# Altium PCB Walrus.PcbDoc (part 3 of 3)
Units mm, origin at the board's own origin, x right, y up, seen from the top; angles counter-clockwise.
Board outline 65 x 30.33 mm, 2 copper layers (Top, Bottom), stack 1.545 mm thick; 106 components, 76 nets, 395 pads, 305 vias.
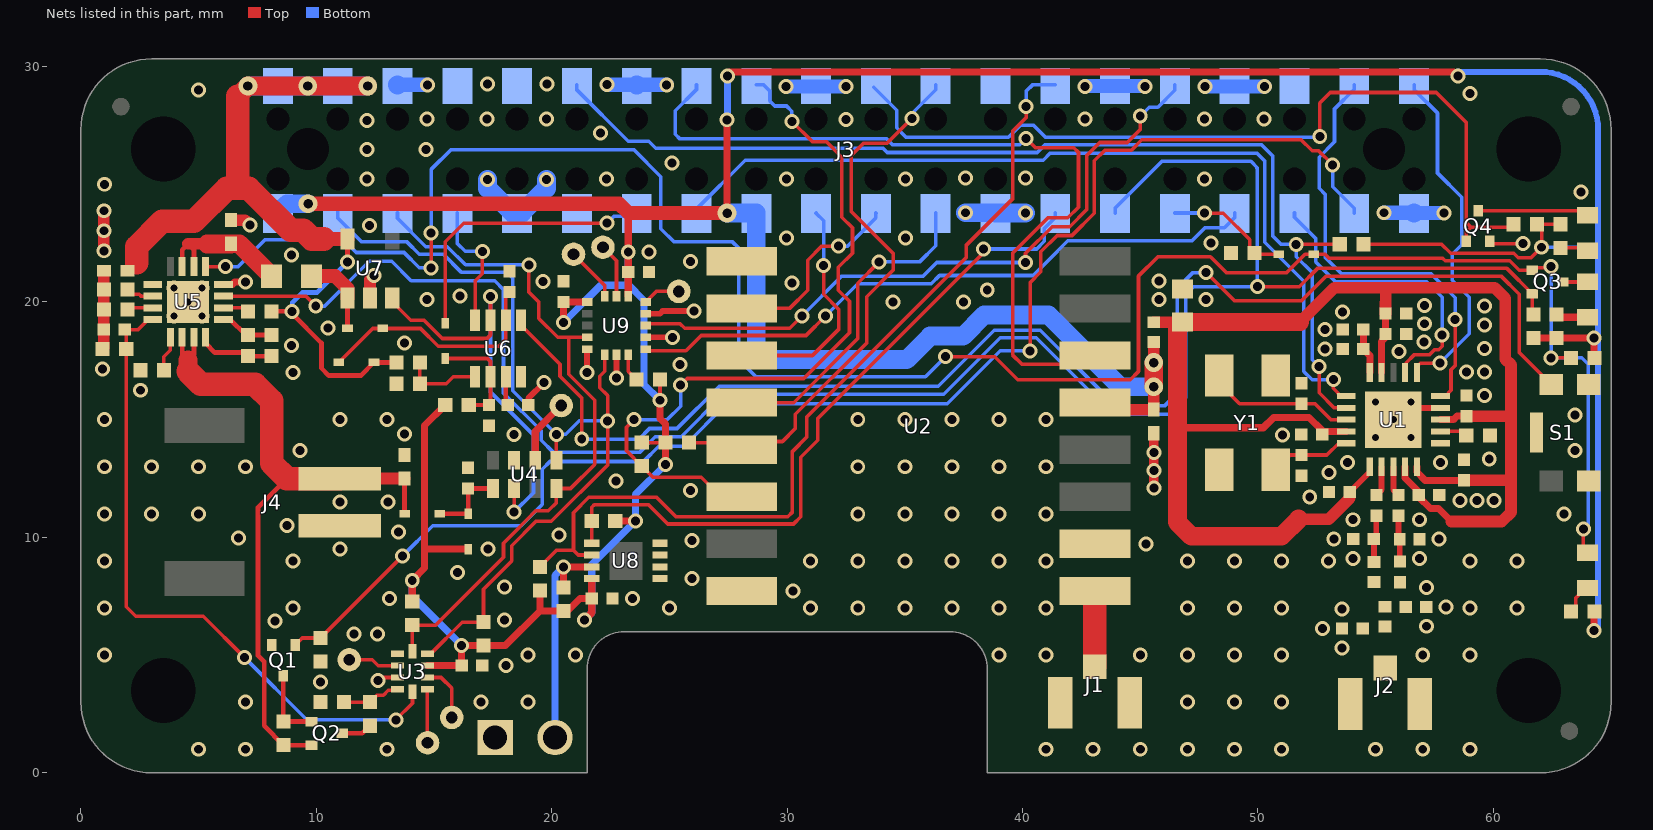
[diagram p2: the nets of this part, all layers, seen from the top]

## Via types
v1: diameter 0.635, hole 0.381, Top to Bottom, 288 vias
v2: diameter 0.635, hole 0.3, Top to Bottom, 10 vias
v3: diameter 0.8, hole 0.4, Top to Bottom, 7 vias

## Nets (pads, with @x,y where several pads share a name; then routed paths per layer and width w, separated by ;. In a path a pad name is that pad's centre, name@x,y a point inside that pad or via, vN(x,y) a via of type N, cw(c..) or ccw(c..) an arc to the next point about the centre after c; other vN are vias at no path point)
3V3: C2.2 C3.2 C12.2 C13.2 C14.2 D2.2 FB1.2 J3.1 J3.17 R5.2 R6.2 R13.2 R17.2 R18.2 R19.2 R20.2 R21.2 R24.2 R25.2 R26.2 R27.2 R29.2 R30.2 R31.2 R32.2 U2.13 U3.8 U8.8 U9.1 U9.14 | length 189.6
  Top w0.152: R30.2@23.825,14.025 R31.2@24.825,14.025 ; v1(24.6,15.825) R27.2@24.6,16.7 ; R32.2@54.475,22.45 57.8,22.45 58.185,22.065 60.86,22.065 61.05,21.875 61.6,21.875 v1(62.05,22.325) 62.05,23.1 R29.2@61.85,23.3 R21.2@62.85,23.3
  Top w0.3: R5.2@14.075,7.275 v1(14.075,8.175) 14.6,8.7 14.6,14.75 R13.2@15.475,15.625 ; 14.6,9.5 D2.2@16.45,9.5 ; U3.8@14.72,4.55 C3.2@16.175,4.55 ; C3.2@16.175,4.53 C3.2@16.175,4.55 ; R24.2@19.5,7.75 19.5,6.875 ; v1(20.5,19.125) C14.2@20.5,20 U9.1@21.5,20 ; v1(21.4,6.5) 21.7,6.8 C12.2@21.7,7.4 ; U8.8@21.7,8.25 C12.2@21.7,7.4 ; R25.2@22.7,10.7 v1(23.55,10.7) ; U9.14@23.25,20.25 C13.2@23.25,21.275 v1(23.25,22.125) 23.25,23.765 23.26,23.775 ; v1(24.6,15.825) 24.6,15.05 24.825,14.825 R31.2@24.825,14.025 v1(24.825,13.1) ; v3(27.45,23.775) v1(27.45,27.74) ; v1(27.475,29.6) 27.475,29.7 27.55,29.775 58.325,29.775 v1(58.5,29.6) ; R20.2@61.7,18.475 R18.2@62.675,18.475 v1(64.275,18.475) 64.275,17.65 R17.2@64.3,17.625 ; v1(64.275,6.05) 64.275,6.825 R19.2@64.3,6.85 ; C3.2@16.175,4.55 v1(16.175,5.4) R6.2@17.1,5.4 18.025,5.4 19.5,6.875 ; 19.5,6.875 R26.2@20.5,6.875 20.67,6.875 21.195,7.4 C12.2@21.7,7.4
  Top w0.5: U2.13@43.075,15.725 43.375,15.425 C2.2@45.575,15.425 v3(45.575,16.4) ; v3@45.575,16.8 FB1.2@45.575,18.26
  Top w0.6: v3(9.65,24.175) 22.86,24.175 23.26,23.775 v3(27.45,23.775)
  Top w0.8: v3(45.575,16.4) v3(45.575,17.425)
  Bottom w0.152: v1(62.05,22.325) 64.475,22.325
  Bottom w0.25: v1@58.5,29.775 62,29.775 cw(c62,27.325) 64.45,27.325 64.45,22.325 64.45,18.625 v1@64.3,18.475 ; v1(64.275,6.05) 64.3,6.05 64.45,6.2 64.45,18.325 v1@64.3,18.475 ; v1@64.3,18.475 v1(64.275,18.475) v1@64.3,18.475
  Bottom w0.3: v1(14.075,8.175) 14.075,7.5 v1(16.175,5.4) ; v1(20.5,19.125) 22.085,20.71 23.25,20.71 23.25,20.737 ; v1(21.4,6.5) 21.7,6.8 21.7,8.85 v1(23.55,10.7) 23.55,11.825 v1(24.825,13.1) ; v1(23.25,22.125) 23.25,20.737 ; v1(24.6,15.825) 23.925,16.5 23.925,20.062 23.25,20.737 ; v1@27.475,27.765 v1(27.475,29.6) ; v1(58.5,29.6) v1@58.5,29.775
  Bottom w0.8: J3.1@8.37,23.78 J3.1@8.375,23.785 ; J3.1@8.37,23.79 J3.1@8.375,23.785 ; v3(9.65,24.175) 8.765,24.175 J3.1@8.375,23.785 ; v3(27.45,23.775) 28.675,23.775 J3.17@28.685,23.785 ; J3.17@28.69,23.79 J3.17@28.685,23.785 ; v3(45.575,16.4) 44.15,16.4 41.1,19.45 38.375,19.45 37.475,18.55 36.075,18.55 35.075,17.55 29.125,17.55 28.69,17.985 28.69,23.78 J3.17@28.685,23.785
5V0: C5.2 D4.2 J3.2 J3.4 R7.1 R15.2 U5.13 U7.5 | length 38
  Top w0.2: R7.1@8.1,19.6 v1(8.975,19.6) 8.975,19.5 10.22,18.255 10.22,17.185 10.53,16.875 11.895,16.875 D4.2@12.45,17.43 13.395,17.43 R15.2@13.4,17.425 ; v1(11.325,21.7) U7.5@11.325,22.675
  Top w0.6: 10.325,22.675 U7.5@11.325,22.675
  Top w0.8: 6.666,28.746 7.09,29.17 v3@12.185,29.17
  Top w1: 2.375,21.675 2.375,22.35 3.45,23.425 4.8,23.425 6.2,24.825 7.133,24.825 8.921,23.037 9.45,23.037 9.812,22.675 10.325,22.675 ; 6.666,24.825 6.666,28.746
  Bottom w0.2: v1(8.975,19.6) 8.975,19.975 9.4,20.4 10.025,20.4 v1(11.325,21.7)
  Bottom w0.8: v3(7.095,29.175) v3(9.635,29.175) 10.905,29.175 10.91,29.18 10.915,29.175 v3(12.185,29.175) ; J3.2@8.355,29.175 J3.2@8.36,29.18 ; J3.2@8.365,29.175 J3.2@8.37,29.18
ADC1: TP5.1 U9.16 | length 2.3
  Top w0.152: TP5.1@20.925,22.025 22.25,20.7 U9.16@22.25,20.25
ADC2: TP6.1 U9.15 | length 2.3
  Top w0.152: TP6.1@22.175,22.325 22.75,21.75 U9.15@22.75,20.25
ADC3: TP7.1 U9.13 | length 1.6
  Top w0.152: U9.13@24,20 24.45,20.45 TP7.1@25.4,20.45
AIN2: TP1.1 U3.6 | length 2.3
  Top w0.152: U3.6@14.72,3.55 14.72,1.28 TP1.1@14.725,1.275
AIN3: TP2.1 U3.7 | length 2.5
  Top w0.152: U3.7@14.72,4.05 15.3,4.05 15.75,3.6 TP2.1@15.75,2.35
ALERT/RDY: TP3.1 U3.2 | length 2.2
  Top w0.152: TP3.1@11.4,4.8 12.375,4.8 12.625,4.55 U3.2@13.45,4.55
CHG_CHG_N: D8.1 D11.2 Q3.1 R17.1 U5.9 | length 91.5
  Top w0.152: U5.9@5.3,21.5 v1(6.15,21.5) ; v1(14.875,21.45) v1(14.875,22.925) ; v1(36.725,17.675) 38.82,17.675 39.795,16.7 44.575,16.7 44.925,17.05 44.925,21.1 45.75,21.925 47.98,21.925 48.655,21.25 51.225,21.25 52,22.025 D11.2@52.375,22.025 52.85,22.025 53.025,21.85 57.85,21.85 57.95,21.75 60.7,21.75 61.1,21.35 Q3.1@61.65,21.35 61.75,21.45 62.4,21.45 v1(62.45,21.5) ; v1(62.45,17.625) R17.1@63.3,17.625 ; v1(63.825,10.35) 63.825,9.525 D8.1@64,9.35
  Bottom w0.152: v1(6.15,21.5) 6.675,21.5 7.825,22.65 11.15,22.65 11.7,22.1 13.725,22.1 14.375,21.45 v1(14.875,21.45) ; v1(14.875,22.925) 14.875,25.625 15.725,26.475 23.484,26.475 24.635,25.325 24.635,23.115 25.2,22.55 27.681,22.55 27.942,22.289 27.942,17.558 28.675,16.825 35.875,16.825 v1(36.725,17.675) ; v1(62.45,21.5) v1(62.45,17.625) 63.756,17.625 64.025,17.356 64.025,10.55 v1(63.825,10.35)
CHG_EN1: R7.2 U5.6 | length 1.1
  Top w0.152: U5.6@6.05,19.75 6.95,19.75 R7.2@7.1,19.6
CHG_ISET: C6.2 R11.2 U3.5 U5.16 | length 28
  Top w0.152: C6.2@1.855,18.825 1.925,18.755 R11.2@1.925,18 1.925,7.06 2.335,6.65 5.2,6.65 v1(6.95,4.9) ; C6.2@1.925,18.775 1.975,18.825 2.425,18.825 2.85,19.25 U5.16@3.05,19.25 ; v1(13.376,2.251) 14.085,2.96 U3.5@14.085,3.44
  Bottom w0.152: v1(6.95,4.9) 9.599,2.251 v1(13.376,2.251)
CHG_ITERM: R12.2 U5.15 | length 1.1
  Top w0.152: R12.2@1.975,19.675 2.05,19.75 U5.15@3.05,19.75
CHG_OUT: C8.2 F1.1 U5.10 U5.11 | length 6.3
  Top w0.2: U5.11@4.3,21.5 4.3,22.219 4.55,22.469 4.8,22.219 U5.10@4.8,21.5
  Top w0.5: 4.55,22.469 5.369,22.469
  Top w0.8: 5.369,22.469 C8.2@6.375,22.469 ; C8.2@6.375,22.475 6.725,22.475 F1.1@8.1,21.1
CHG_TMR: R10.2 U5.14 | length 1.2
  Top w0.152: R10.2@1.975,20.525 2.175,20.325 2.475,20.325 2.55,20.25 U5.14@3.05,20.25
CHG_TS: R14.2 U5.1@3.8,18.5 | length 1.5
  Top w0.152: R14.2@3.525,17.1 3.525,17.675 3.8,17.95 U5.1@3.8,18.5
DCOUPL: C51.2 C512.2 U1.5 | length 1.9
  Top w0.3: C51.2@54.475,18.825 C512.2@54.475,18 54.75,17.725 U1.5@54.75,17
GND: C1.1 C2.1 C3.1 C4.1 C5.1 C6.1 C7.1 C8.1 C9.1 C10.1 C11.1 C12.1 C13.1 C14.1 C20.1 C21.1 C41.1 C51.1 C91.1 C111.1 C122.1 C123.1 C124.1 C141.1 C151.1 C181.1 C412.1 C512.1 J1.2 J1.3 J2.2 J2.3 J3.6 J3.9 J3.14 J3.20 J3.25 J3.30 J3.34 J3.39 J4.2 J5.1 L131.1 Q1.2 Q4.2 R1.1 R4.1 R8.1 R8.2 R9.1 R9.2 R10.1 R11.1 R12.1 R14.1 R16.1 R23.1 R171.1 S1.2 S1.4 S1.5 U1.16 U1.19 U1.21 U2.1 U2.8 U2.10 U3.1 U3.3 U4.3 U5.4 U5.5 U5.8 U5.17 U6.4 U7.2 U8.1 U8.2 U8.3 U8.4 U9.5 U9.7 U9.10 U9.12 Y1.2 Y1.4 | length 47.7
  Top w0.152: v1(12.625,3.925) 12.75,4.05 U3.3@13.45,4.05 ; Q4.2@59.85,22.575 59.95,22.475 v1(61.25,22.475)
  Top w0.2: U5.4@5.3,18.5 5.3,18.241 5.691,17.85 6.95,17.85 R9.2@7.1,17.7 R9.1@8.1,17.7 ; U5.5@6.05,19.25 6.35,19.25 7,18.6 R8.2@7.1,18.6 R8.1@8.1,18.6
  Top w0.25: C11.1@19.005,15.625 19.005,15.905 v1(19.675,16.575) ; v1(21.5,17) U9.5@21.5,18 ; v1(22.75,16.775) U9.7@22.75,17.75 ; U9.10@24,18.5 v1(25.125,18.5) ; U9.12@24,19.5 24.6,19.5 24.709,19.609 v1(26.05,19.609) ; v2(55.75,15) 56.25,15.5 U1.19@57.75,15.5
  Top w0.3: U5.8@6.05,20.75 6.435,20.75 6.535,20.85 v1(7,20.85) ; v1(18.4,14.375) v1@18.4,14.525
  Top w0.4: v1(45.575,12.1) v1(45.575,12.85) v1(45.575,13.6) C2.1@45.575,14.425
  Top w0.5: R11.1@0.925,18 0.975,18.05 R12.1@0.975,19.675 R10.1@0.975,20.525 C5.1@0.975,21.325 ; v1(0.975,22.175) v1(0.975,23.025) v1(0.975,23.875) ; C8.1@6.375,23.475 6.975,23.475 v1(7.175,23.275) ; U7.2@12.275,20.175 12.275,20.95 v1(12.45,21.125)
  Bottom w0.6: J3.6@13.455,29.225 v1(14.725,29.225) ; v1@22.34,29.225 v1(24.885,29.225) ; v1(29.95,29.15) 32.475,29.15 v1(32.5,29.15) ; v1@42.65,29.175 v1@45.2,29.175 ; v1@47.75,29.175 47.775,29.15 v1(50.275,29.15) ; v1(55.36,23.79) J3.39@56.63,23.79 ; J3.39@56.635,23.785 v1(57.905,23.785)
  Bottom w0.8: J3.6@13.45,29.22 13.455,29.225 J3.6@13.45,29.23 ; v1(17.275,25.2) 17.275,24.825 18.32,23.78 18.73,23.78 19.775,24.825 v1(19.775,25.2) ; J3.14@23.61,29.22 J3.14@23.615,29.225 ; v1(37.58,23.79) 38.85,23.79 J3.25@38.855,23.785 ; J3.25@38.85,23.78 J3.25@38.855,23.785 ; v1(40.125,23.785) J3.25@38.855,23.785 ; J3.39@56.63,23.78 56.635,23.785 J3.39@56.63,23.79
  other v1: 5,1 7,1 13,1 41,1 43,1 45,1 47,1 49,1 51,1 55,1 57,1 59,1 7,3 17,3 19,3 47,3 49,3 51,3 10.175,3.85 18.05,4.55 1,5 19,5 21,5 39,5 41,5 45,5 47,5 49,5 51,5 57,5 59,5 53.57,5.3 11.6,5.9 12.6,5.9 52.745,6.125 57.155,6.225 8.25,6.45 18,6.5 53.57,6.95 1,7 9,7 25,7 31,7 33,7 35,7 37,7 39,7 41,7 47,7 49,7 51,7 59,7 61,7 57.98,7.05 13.1,7.4 23.425,7.4 30.25,7.725 57.155,7.875 18,7.9 25.95,8.25 16,8.5 1,9 9,9 31,9 33,9 35,9 37,9 39,9 41,9 47,9 49,9 51,9 53,9 59,9 61,9 54.045,9.1 56.865,9.1 11,9.5 17.3,9.5 45.25,9.725 25.95,9.875 53.22,9.925 57.69,9.925 6.7,9.975 20.3,10.1 13.5,10.225 8.75,10.5 54.045,10.75 56.865,10.75 1,11 3,11 5,11 33,11 35,11 37,11 39,11 41,11 63,11 11,11.5 13.05,11.5 58.575,11.575 59.3,11.575 60.025,11.575 52.2,11.725 25.9,12 22.725,12.4 53.02,12.75 1,13 3,13 5,13 7,13 33,13 35,13 37,13 39,13 41,13 53.8,13.175 57.75,13.175 59.825,13.325 9.3,13.7 63.475,13.7 51.05,14.35 13.75,14.4 1,15 11,15 13,15 33,15 35,15 37,15 39,15 41,15 63.475,15.2 59.625,16.025 2.525,16.25 9,17 58.85,17.025 59.625,17.025 0.925,17.15 25.45,17.35 56,17.9 52.85,18 59.625,18.025 8.95,18.15 13.75,18.25 57.05,18.3 52.85,18.825 10.5,18.9 59.625,19.025 57.075,19.075 53.6,19.575 59.625,19.825 57.075,19.85 34.5,20 37.5,20 14.7,20.1 45.8,20.1 47.8,20.1 16.1,20.25 38.5,20.5 30.2,20.8 19.625,20.875 45.8,20.9 25.9,21.725 8.95,22 24.13,22.125 48,22.5 29.975,22.725 35.025,22.725 12.25,23.25 63.725,24.675 1,25 12.15,25.225 22.325,25.225 29.975,25.225 35.025,25.225 47.725,25.225 37.575,25.275 40.125,25.275 25.1,25.9 12.15,26.475 14.65,26.475 22.075,27.175 12.15,27.7 32.5,27.75 14.7,27.775 17.25,27.775 19.775,27.775 42.65,27.775 47.725,27.775 50.25,27.775 59,28.85 5,29 42.65,29.15 45.2,29.15 47.75,29.15 22.34,29.23 17.275,29.25 19.8,29.25
  other v2: 55,14.25 56.5,14.25 55,15.75 56.5,15.75 3.95,19.4 5.15,19.4 4.55,20 3.95,20.6 5.15,20.6
GPIO2/SDA1I2C: J3.3 R6.1 U3.9 U4.1 U9.6 | length 36.9
  Top w0.152: U3.9@14.72,5.05 14.85,5.05 16.2,6.4 R6.1@17.1,6.4 17.1,7.8 18.3,9 18.3,9.65 19.333,10.683 19.983,10.683 22.375,13.075 v1(22.375,14.95) 22.375,16.025 22.038,16.362 22.038,16.84 22.25,17.053 U9.6@22.25,17.75 ; U4.1@20.2,13.275 v1(20.2,14.375)
  Bottom w0.152: J3.3@10.91,24.01 10.91,23.565 11.925,22.55 13.85,22.55 14.375,22.025 15.4,22.025 16.17,21.255 18.11,21.255 18.35,21.015 18.35,16.225 19.875,14.7 v1(20.2,14.375) 20.6,14.375 21.175,14.95 v1(22.375,14.95)
GPIO3/SCL1I2C: J3.5 R5.1 U3.10 U4.8 U9.4 | length 29.7
  Top w0.152: U3.10@14.085,5.16 14.075,5.17 R5.1@14.075,6.275 15.075,6.275 17.95,9.15 17.95,9.75 19.327,11.127 19.852,11.127 20.2,11.475 U4.8@20.2,12.075 20.8,12.075 21.825,13.1 21.825,15.825 20.725,16.925 20.725,18.5 ; v1(19.025,21.575) 19.025,20.425 19.45,20 19.45,19.3 20.25,18.5 20.725,18.5 ; U9.4@21.5,18.5 20.725,18.5
  Bottom w0.152: J3.5@13.45,23.78 13.45,23.55 14.65,22.35 15.565,22.35 16.34,21.575 v1(19.025,21.575)
GPIO4/PB_INT_N: J3.7 U6.8 | length 5.5
  Top w0.152: U6.8@16.75,19.22 16.75,20.9 17.05,21.2 v1(17.05,22.15)
  Bottom w0.152: J3.7@15.99,23.78 15.99,22.485 16.325,22.15 v1(17.05,22.15)
GPIO5/PG_N: J3.29 Q3.2 R20.1 U5.7 | length 84.8
  Top w0.152: U5.7@6.05,20.25 9.55,20.25 v1(9.975,19.825) ; v1(49.975,20.65) 51.75,20.65 52.525,21.425 60.575,21.425 Q3.2@61.65,20.35 61.65,19.55 R20.1@61.725,19.475
  Bottom w0.152: v1(9.975,19.825) 10.35,19.825 12.25,21.725 13.2,21.725 14.025,20.9 17.575,20.9 17.95,20.525 17.95,16.125 19.55,14.525 19.55,14.125 20.05,13.625 23.75,13.625 24.4,14.275 25.5,14.275 27.3,16.075 36.65,16.075 39.05,18.475 40.575,18.475 43.825,15.225 46.225,15.225 46.925,15.925 46.925,20.313 47.261,20.65 v1(49.975,20.65) 49.975,25.65 49.95,25.675 49.975,25.7 49.7,25.975 45.925,25.975 43.93,23.98 J3.29@43.93,23.78
GPIO6/CHG_N: D11.1 J3.31 R23.2 | length 5.3
  Top w0.152: v1(47.725,23.775) 48.525,23.775 49.65,22.65 49.65,22.275 R23.2@49.85,22.075 49.9,22.025 D11.1@50.875,22.025
  Bottom w0.152: J3.31@46.47,23.78 v1@47.72,23.78
GPIO7/SPI0_CE1_N: J3.26
GPIO8/RFM69_CE0_N: J3.24 R31.1 U2.5 | length 24.4
  Top w0.152: R31.1@25.825,14.025 27.775,14.025 U2.5@28.075,13.725 28.425,14.075 29.8,14.075 30.35,14.625 30.35,15.23 33.375,18.255 33.375,20.225 34.5,21.35 34.5,22.07 32.725,23.845 32.725,26.225 33.25,26.75 34.25,26.75 v1(35.3,27.8)
  Bottom w0.152: v1(35.3,27.8) 35.1,27.8 36.31,29.01 J3.24@36.31,29.22
GPIO9/RFM69_MISO: J3.21 U2.2 | length 8.3
  Top w0.152: U2.2@28.075,19.725 30.1,19.725 30.875,20.5 30.875,21.775 31.475,22.375 v1(32.175,22.375)
  Bottom w0.152: v1(32.175,22.375) 32.575,22.375 33.77,23.57 33.77,23.78 J3.21@33.775,23.775
GPIO10/RFM69_MOSI: J3.19 U2.3 | length 9.9
  Top w0.152: U2.3@28.075,17.725 31.075,17.725 32.2,18.85 32.2,19.675 31.55,20.325 v1(31.55,21.55)
  Bottom w0.152: J3.19@31.23,23.78 31.225,23.775 31.55,23.45 v1(31.55,21.55)
GPIO11/RFM69_SCLK: J3.23 U2.4 | length 13.8
  Top w0.152: U2.4@28.075,15.725 30.275,15.725 33,18.45 33,20.8 v1(33.9,21.7)
  Bottom w0.152: v1(33.9,21.7) 35.625,21.7 36.31,22.385 J3.23@36.31,23.78
GPIO12/PWM0/ACC_INT1: J3.32 U9.11 | length 28.9
  Top w0.152: U9.11@24,19 24.075,19.075 25.45,19.075 25.645,18.88 30.105,18.88 v1(30.625,19.4) ; v1(40.125,21.675) 40.125,22.065 41.26,23.2 42,23.2 42.725,23.925 42.725,26.225 43.275,26.775 44.45,26.775 45,27.325 v1(45,27.9)
  Bottom w0.152: v1(30.625,19.4) 32.325,21.1 35.775,21.1 36.35,21.675 v1(40.125,21.675) ; v1(45,27.9) 45.375,28.275 45.75,28.275 46.47,28.995 J3.32@46.47,29.22
GPIO13/PWM1/ACC_INT2: J3.33 U9.9 | length 27.6
  Top w0.152: U9.9@24,18 24.075,17.925 25.7,17.925 26.35,18.575 30.8,18.575 v1(31.625,19.4)
  Bottom w0.152: v1(31.625,19.4) 33,20.775 36.125,20.775 36.475,21.125 40.45,21.125 41.087,21.762 41.925,22.6 47.2,22.6 47.75,23.15 48.575,23.15 49.01,23.585 J3.33@49.01,23.78
GPIO14/UART0_TXD: J3.8
GPIO15/UART0_RXD: J3.10
GPIO16/SPI1_CE2: J3.36
GPIO17/SPI1_CE1: J3.11
GPIO18/CC2500_CE0_N: J3.12 R32.1 U1.7 | length 45.7
  Top w0.152: v1(51.625,22.45) R32.1@53.475,22.45 ; v1(52.6,17.25) 52.6,16.145 53.245,15.5 U1.7@53.75,15.5
  Bottom w0.152: J3.12@21.07,29.22 21.07,29.005 23.25,26.825 24.125,26.825 24.425,26.525 34.075,26.525 34.25,26.35 40.625,26.35 40.95,26.675 50.15,26.675 50.625,26.2 50.625,22.8 50.975,22.45 v1(51.625,22.45) 51.625,21.925 52.3,21.25 52.3,17.55 v1(52.6,17.25)
GPIO19/CC2500_MISO: J3.35 U1.2 | length 12.8
  Top w0.152: U1.2@56.25,17 56.3,17.05 56.3,17.425 56.625,17.75 57.275,17.75 57.5,17.975 57.675,17.975 57.825,18.125 v1(57.825,18.6)
  Bottom w0.152: J3.35@51.55,23.78 51.55,23.6 52.45,22.7 52.45,21.7 53.3,20.85 57.175,20.85 57.825,20.2 v1(57.825,18.6)
GPIO20/CC2500_MOSI: J3.38 U1.20 | length 18.8
  Top w0.152: U1.20@57.75,16 57.95,16 58.2,16.25 58.2,17.125 58.375,17.3 v1(58.375,19.25)
  Bottom w0.152: J3.38@54.09,29.22 54.09,29.04 53.25,28.2 53.25,26.8 52.6,26.15 52.6,24.825 52.85,24.575 52.85,21.9 53.55,21.2 57.35,21.2 58.375,20.175 v1(58.375,19.25)
GPIO21/CC2500_SCLK: J3.40 U1.1 | length 14.9
  Top w0.152: U1.1@56.75,17 56.75,17.25 56.9,17.4 v1(57.725,17.4)
  Bottom w0.152: J3.40@56.63,29.22 56.63,29.02 57.625,28.025 57.625,25.475 58.65,24.45 58.65,22.431 58.25,22.031 58.25,20.925 58.975,20.2 58.975,18.65 v1(57.725,17.4)
GPIO22/CC2500_GDO0: J3.15 U1.6 | length 37.5
  Top w0.152: v1(53.2,16.7) 53.2,16.33 53.53,16 U1.6@53.75,16
  Bottom w0.152: J3.15@26.15,23.78 26.15,23.95 28.225,26.025 40.875,26.025 41.175,26.325 49.95,26.325 50.285,25.99 50.285,22.54 51.95,20.875 51.95,17.05 52.3,16.7 v1(53.2,16.7)
GPIO23/RFM69_DIO0: J3.16 U2.14 | length 34.2
  Top w0.152: v1(40.15,26.95) 40.55,26.55 42.175,26.55 42.375,26.35 42.375,24.025 41.925,23.575 41.08,23.575 39.575,22.07 39.575,17.75 39.975,17.35 41.963,17.35 42.338,17.725 U2.14@43.075,17.725
  Bottom w0.152: J3.16@26.15,29.22 26.15,29.025 25.25,28.125 25.25,27.125 25.45,26.925 34.225,26.925 34.475,26.675 39.875,26.675 v1(40.15,26.95)
GPIO24/RFM69_RST: J3.18 R30.1 U2.6 | length 31.9
  Top w0.152: v1(23.5,15) 23.175,14.675 23.175,13.675 R30.1@23.825,13.025 24.3,12.55 26.35,12.55 27.175,11.725 U2.6@28.075,11.725 ; v1(25.475,16.475) 25.75,16.75 30.709,16.75 32.65,18.691 32.65,20.025 32.175,20.5 32.175,21.475 32.775,22.075 32.775,23.15 32.325,23.6 32.325,26.15 31.675,26.8 31.075,26.8 v1(30.2,27.675)
  Bottom w0.152: v1(23.5,15) 24.9,15 25.475,15.575 v1(25.475,16.475) ; J3.18@28.69,29.22 29.005,29.22 29.26,28.965 29.26,28.54 29.475,28.325 29.975,28.325 30.2,28.1 v1(30.2,27.675)
GPIO25/LED_BLUE: J3.22 Q4.1 R29.1 | length 36.1
  Top w0.152: v1(52.625,27.025) 52.625,28.45 53.075,28.9 57.575,28.9 58.85,27.625 58.85,23.375 59.05,23.175 ; Q4.1@58.85,22.575 58.85,22.975 59.05,23.175 ; R29.1@60.85,23.175 59.05,23.175
  Bottom w0.152: J3.22@33.675,29.125 34.655,28.145 34.655,27.395 35.05,27 39.4,27 39.9,27.5 40.475,27.5 40.975,27 v1@52.625,27
GPIO26/VBATT_MEAS_EN: J3.37 Q1.1 R1.2 | length 60.2
  Top w0.152: Q1.1@9.1,5.425 9.4,5.725 R1.2@10.175,5.725 v1(13.662,9.212) ; v1(40.325,17.925) 40.325,20.83 40.775,21.28 40.775,22.131 41.469,22.825 42.1,22.825 43.05,23.775 43.05,26 43.5,26.45 44.625,26.45 45.069,26.894 51.831,26.894 52.3,26.425 52.575,26.425 v1(53.175,25.825)
  Bottom w0.152: v1(13.662,9.212) 14.95,10.5 18.7,10.5 19.6,11.4 19.6,12.9 19.925,13.225 23.9,13.225 24.55,13.875 25.625,13.875 27.425,15.675 36.8,15.675 39.05,17.925 v1(40.325,17.925) ; v1(53.175,25.825) 53.175,24.9 54.09,23.985 J3.37@54.09,23.78
GPIO27/PB_KILL_RPI_N: D3.1 J3.13 | length 12.1
  Top w0.152: D3.1@15.475,19.1 15.475,22.558 16.267,23.35 v1(22.35,23.35)
  Bottom w0.152: v1(22.35,23.35) 22.65,23.65 23.48,23.65 J3.13@23.61,23.78
ID_SC/I2C_ID_EEP: J3.28 R24.1 U8.6 | length 37.5
  Top w0.152: R24.1@19.5,8.75 20.2,9.45 20.925,9.45 ; U8.6@21.7,9.25 21.125,9.25 20.925,9.45 ; v1(40.15,28.3) 40.15,27.825 39.575,27.25 39.575,24.375 37.6,22.4 37.6,21.875 30.825,15.1 30.825,14.25 30.225,13.65 30.225,11.075 30.025,10.875 25.275,10.875 24.45,11.7 21.575,11.7 20.925,11.05 20.925,9.45
  Bottom w0.152: v1(40.15,28.3) 40.15,28.95 40.42,29.22 J3.28@41.39,29.22
ID_SD/I2C_ID_EEP: J3.27 R25.1 U8.5 | length 29.6
  Top w0.152: U8.5@21.7,9.75 R25.1@21.7,10.7 21.7,11.275 21.82,11.395 24.105,11.395 24.93,10.57 30.27,10.57 30.575,10.875 30.575,13.4 31.3,14.125 31.3,15.05 38.35,22.1 v1(38.35,22.25)
  Bottom w0.152: v1(38.35,22.25) 40.6,22.25 40.925,22.575 40.925,23.125 41.39,23.59 J3.27@41.39,23.78
LIS3DH_CS: R27.1 U9.8 | length 1.2
  Top w0.152: U9.8@23.25,17.75 23.25,17.05 R27.1@23.6,16.7
NetD6_1: D6.1 Q3.3 | length 1.1
  Top w0.152: Q3.3@62.95,20.85 D6.1@64,20.85
NetD6_2: D6.2 R18.1 | length 1.4
  Top w0.3: R18.1@62.675,19.475 62.8,19.35 D6.2@64,19.35
NetD8_2: D8.2 R19.1 | length 1.3
  Top w0.152: R19.1@63.3,6.85 63.5,7.05 63.5,7.425 63.925,7.85 D8.2@64,7.85
NetD9_1: D9.1 Q4.3 | length 4.7
  Top w0.152: Q4.3@59.35,23.875 63.8,23.875 D9.1@64,23.675
NetD9_2: D9.2 R21.1 | length 1.2
  Top w0.152: R21.1@62.85,22.3 63.875,22.3 D9.2@64,22.175
NetJ5_2: J5.2 R26.1 U8.7 | length 9.5
  Top w0.3: R26.1@20.5,7.875 v1(20.5,8.75) U8.7@21.7,8.75
  Bottom w0.3: J5.2@20.14,1.5 20.14,8.39 v1(20.5,8.75)
NetQ1_3: Q1.3 Q2.1 R2.1 | length 3.1
  Top w0.2: Q1.3@8.6,4.125 R2.1@8.6,2.175 Q2.1@9.8,2.175
NetQ2_3: Q2.3 R3.2 | length 1.3
  Top w0.2: Q2.3@11.1,1.675 11.95,1.675 R3.2@12.275,2
PB_5V0: C10.2 D4.1 D5.1 U6.6 | length 10.1
  Top w0.152: D4.1@10.95,17.43 12.395,18.875 D5.1@12.825,18.875 14.425,18.875 15.175,18.125 17.762,18.125 18.05,18.412 U6.6@18.05,19.22 C10.2@18.05,20.425
PB_EN_N: U4.6 U6.7 U7.3 | length 18
  Top w0.152: U7.3@13.225,20.175 13.225,20.015 14.015,19.225 14.575,19.225 15.35,18.45 17.25,18.45 17.4,18.6 U6.7@17.4,19.22 17.275,19.345 17.4,19.47 v1(17.4,20.225) ; v1(18.4,11.075) U4.6@18.4,12.075
  Bottom w0.152: v1(17.4,20.225) 17.4,16.175 19.225,14.35 19.225,11.9 v1(18.4,11.075)
PB_KILL_N: C7.2 D3.2 R13.1 U6.2 | length 4.7
  Top w0.152: D3.2@15.475,17.6 17.275,17.6 17.4,17.475 U6.2@17.4,16.82 17.4,15.7 C7.2@17.325,15.625 R13.1@16.475,15.625
PB_N: S1.1 U6.5 | length 59.8
  Top w0.152: U6.5@18.7,19.22 18.7,19 20.35,17.35 20.35,16.849 21.275,15.924 v1(21.275,14.175) ; v1(47.8,21.25) 49,20.05 51.85,20.05 52.9,21.1 60.325,21.1 61.1,20.325 61.1,17.85 S1.1@62.45,16.5
  Bottom w0.152: v1(21.275,14.175) 23.7,14.175 24.15,14.625 25.325,14.625 27.125,16.425 36.425,16.425 38.8,18.8 40.75,18.8 43.95,15.6 46.05,15.6 46.575,16.125 46.575,20.589 47.236,21.25 v1(47.8,21.25)
PB_ON: R15.1 R16.2 U6.1 | length 3.4
  Top w0.152: R15.1@14.4,17.425 R16.2@14.4,16.525 15.525,16.525 15.82,16.82 U6.1@16.75,16.82
PB_TMR: C11.2 U6.3 | length 1.2
  Top w0.2: C11.2@18.05,15.625 U6.3@18.05,16.82
RBIAS: R171.2 U1.17 | length 1.2
  Top w0.152: U1.17@57.75,14.5 58.675,14.5 R171.2@58.85,14.325
RF_2.4GHZ_ANT: C124.2 J2.1 L122.2
RF_900MHZ_ANT: J1.1 U2.9 | length 3.2
  Top w1: J1.1@43.075,4.5 U2.9@43.075,7.725
RF_N: C131.1 U1.13 | length 1.3
  Top w0.255: U1.13@55.75,13 55.75,12.025 C131.1@55.975,11.8
RF_N_1: C131.2 C132.1 L131.2 | length 2
  Top w0.25: C131.2@55.975,10.92 55.975,9.975 L131.2@56.025,9.925 C132.1@56.025,8.975
RF_P: C121.1 U1.12 | length 1.3
  Top w0.255: C121.1@55.025,11.8 55.25,12.025 U1.12@55.25,13
RF_P_1: C121.2 C122.2 L121.1 | length 2
  Top w0.25: L121.1@54.925,8.95 C122.2@54.925,9.925 55.025,10.025 C121.2@55.025,10.92
RF_SE: C123.2 C132.2 L121.2 L122.1
RTC_3V3: C4.2 D1.1 D2.1 U4.5 | length 3.3
  Top w0.2: D1.1@15.25,11 D2.1@16.45,11 C4.2@16.45,12.075 U4.5@17.5,12.075
SQW: TP4.1 U4.2 | length 2.8
  Top w0.3: U4.2@19.3,13.275 19.3,14.5 TP4.1@20.4,15.6
VBATT: C9.2 D1.2 J4.1 Q2.2 R2.2 U5.2@4.3,18.5 U5.3@4.8,18.5 | length 30.2
  Top w0.2: U5.2@4.3,18.5 4.3,17.781 4.55,17.531 4.8,17.781 U5.3@4.8,18.5 ; 8.75,12.5 7.525,11.275 7.525,4.982 7.782,4.725 7.782,1.993 R2.2@8.6,1.175 Q2.2@9.8,1.175 ; D1.2@13.75,11 C9.2@13.75,12.5
  Top w0.5: J4.1@11,12.5 C9.2@13.75,12.5
  Top w0.8: 4.55,17.05 4.55,17.531
  Top w1: 4.55,17.05 5.1,16.5 7.4,16.5 8.1,15.8 8.1,13.15 8.75,12.5 J4.1@11,12.5
VBATT/2.0588: R3.1 R4.2 U3.4 | length 2.5
  Top w0.152: R4.2@11.175,3 R3.1@12.275,3 12.575,3.3 12.85,3.3 13.05,3.5 13.45,3.5 U3.4@13.45,3.55
VBATT_PTC: D5.2 F1.2 U7.1 | length 3.4
  Top w0.2: D5.2@11.325,18.875 U7.1@11.325,20.175
  Top w0.6: F1.2@9.8,21.1 10.8,21.1 11.325,20.575 U7.1@11.325,20.175
VDD_CC2500: C1.2 C41.2 C91.2 C111.2 C141.2 C151.2 C181.2 C412.2 FB1.1 U1.4 U1.9 U1.11 U1.14 U1.15 U1.18 | length 68.3
  Top w0.25: C111.2@53.9,11.925 54.75,12.775 U1.11@54.75,13
  Top w0.3: 46.575,14.656 50.226,14.656 50.67,15.1 52.175,15.1 52.725,14.55 C91.2@52.725,14.375 52.85,14.5 U1.9@53.75,14.5 ; U1.4@55.25,17 55.25,18.33 55.424,18.504 C41.2@55.42,19.5 ; U1.14@56.25,13 56.25,12.525 56.825,11.95 C141.2@56.825,11.8 56.825,11.725 57.325,11.225 57.675,11.225 58.225,10.675 ; U1.15@56.75,13 56.75,12.775 57.1,12.425 C151.2@58.75,12.425 ; U1.18@57.75,15 58.31,15 58.46,15.15 C181.2@58.85,15.15
  Top w0.5: FB1.1@45.575,19.14 46.79,19.14 C1.2@46.8,19.15 ; 51.725,10.775 53.004,10.775 53.9,11.671 C111.2@53.9,11.925 ; 51.8,19.15 53.25,20.6 60.05,20.6 60.5,20.15 60.5,17.575 60.75,17.325 60.75,15.15 ; C41.2@55.42,19.5 55.424,20.6 ; 58.225,10.675 60.35,10.675 60.75,11.075 60.75,12.425 ; C151.2@58.75,12.425 60.75,12.425 ; C181.2@58.85,15.15 60.75,15.15 ; 60.75,12.425 60.75,15.15
  Top w0.75: C1.2@46.8,19.15 51.8,19.15
  Top w0.8: C1.2@46.8,19.1 46.575,18.875 46.575,10.65 47.175,10.05 51,10.05 51.725,10.775
XOSC_Q1: C21.2 U1.8 Y1.3 | length 6.4
  Top w0.152: Y1.3@48.35,16.875 48.35,16.543 49.218,15.675 C21.2@51.85,15.675 52.425,15.675 53.1,15 U1.8@53.75,15
XOSC_Q2: C20.2 U1.10 Y1.1 | length 3.5
  Top w0.152: Y1.1@50.75,12.875 51.375,13.5 C20.2@51.85,13.5 52.925,13.5 53.425,14 U1.10@53.75,14
pads on no net: FD1.1 FD2.1 FD3.1 J3.ALGN J3.PASS J4.3 J4.4 S1.3 U1.3 U2.7 U2.11 U2.12 U2.15 U2.16 U4.4 U4.7 U5.0 U5.1@5,20.45 U5.2@4.1,19.55 U5.3@4.1,20.45 U5.12 U7.4 U8.9 U9.2 U9.3

## Polygon pours and split planes (outlines as drawn)
GND on Top "GND_L01_P023" (solid, remove dead copper, pour order 23): 3,0 cw(c3,3) 0,3 0,27.325 cw(c3,27.325) 3,30.325 62,30.325 cw(c62,27.325) 65,27.325 65,3 cw(c62,3) 62,0 38.5,0 38.5,4.412 ccw(c36.912,4.412) 36.912,6 23.088,6 ccw(c23.088,4.412) 21.5,4.412 21.5,0
RF_2.4GHZ_ANT on Top "RF_2.4GHZ_ANT_L01_P020" (solid, remove dead copper, pour order 20): 54.45,6.45 54.45,5.425 54.925,4.95 55.9,4.95 55.9,5.725 55.65,5.975 55.65,6.45
5V0 on Top "5V0_L01_P021" (solid, remove dead copper, pour order 21): 1.7,20.9 1.836,20.9 2.136,20.6 3.45,20.6 3.45,21.775 1.7,21.775
RF_SE on Top "RF_SE_L01_P022" (solid, remove dead copper, pour order 22): 54.65,8.095 54.65,7.5 55.35,6.8 56.525,6.8 56.525,8.095
GND on Bottom "GND_L02_P024" (solid, remove dead copper, pour order 24): 3,0 cw(c3,3) 0,3 0,27.325 cw(c3,27.325) 3,30.325 62,30.325 cw(c62,27.325) 65,27.325 65,3 cw(c62,3) 62,0 38.5,0 38.5,4.412 ccw(c36.912,4.412) 36.912,6 23.088,6 ccw(c23.088,4.412) 21.5,4.412 21.5,0

## Keep-outs
Top:
  circle w0.02: c3.5,3.5 r2.5
  lines w0.02: 1.269,27.629 ccw(c3.5,26.5) 2.382,28.736 ; 62.618,1.264 cw(c61.5,3.5) 63.731,2.371 ; 62.618,28.736 ccw(c61.5,26.5) 63.731,27.629
Bottom:
  circle w0.02: c61.5,3.5 r2.5
  circle w0.02: c3.5,26.5 r2.5
  circle w0.02: c3.5,3.5 r2.5
  lines w0.02: 63.964,26.077 cw(c61.5,26.5) 63.969,26.891 63.964,26.077
Keep-Out Layer:
  lines w0.5: 21.5,0 21.5,4.412 cw(c23.088,4.412) 23.088,6 36.912,6 cw(c36.912,4.412) 38.5,4.412 38.5,0 ; 0,3 0,3 ; 0,27.325 0,27.325 ; 3,30.325 3,30.325 ; 62,30.325 62,30.325 ; 65,3 65,3 ; 65,27.325 65,27.325
  lines w0.765: 21.5,0 3,0 cw(c3,3) 0,3 0,27.325 cw(c3,27.325) 3,30.325 62,30.325 cw(c62,27.325) 65,27.325 65,3 cw(c62,3) 62,0 38.5,0

## Other copper
Top:
  pour cut-out: 2.9,16.1 2.9,13.483 7.45,13.483 7.45,16.1
  pour cut-out: 2.9,9.6 2.9,6.983 7.45,6.983 7.45,9.6
  pour cut-out: 53.925,4.027 53.925,1.85 56.875,1.85 56.875,4.027
  pour cut-out: 41.6,4.077 41.6,1.9 44.55,1.9 44.55,4.077
  pour cut-out: 7.75,5.052 7.75,4.552 9.05,4.552 9.05,5.052
  pour cut-out: 9.8,1.675 9.8,1.175 11.1,1.175 11.1,1.675
  pour cut-out: 41.6,11.125 41.6,8.575 44.55,8.575 44.55,11.125
  pour cut-out: 26.771,22.578 26.771,20.325 29.397,20.325 29.397,22.578
  pour cut-out: 26.709,9.006 26.709,8.323 29.55,8.323 29.55,9.006
  pour cut-out: 5.05,19.025 5.05,17.625 6.4,17.625 6.4,17.125 7.6,17.125 7.6,19.15 6.675,19.15 6.675,19.495 5.55,19.495 5.55,19.025
  pour cut-out: 29.55,6.737 29.55,7.127 26.709,7.127 26.709,6.738
  pour cut-out: 50.81,25.975 50.81,24.475 52.31,24.475 52.31,25.975
  pour cut-out: 48.27,25.975 48.27,24.475 49.77,24.475 49.77,25.975
  pour cut-out: 45.73,25.975 45.73,24.475 47.23,24.475 47.23,25.975
  pour cut-out: 43.19,25.975 43.19,24.475 44.69,24.475 44.69,25.975
  pour cut-out: 40.65,25.975 40.65,24.475 42.15,24.475 42.15,25.975
  pour cut-out: 38.11,25.975 38.11,24.475 39.61,24.475 39.61,25.975
  pour cut-out: 35.57,25.975 35.57,24.475 37.07,24.475 37.07,25.975
  pour cut-out: 33.03,25.975 33.03,24.475 34.53,24.475 34.53,25.975
  pour cut-out: 30.49,25.975 30.49,24.475 31.99,24.475 31.99,25.975
  pour cut-out: 27.95,25.975 27.95,24.475 29.45,24.475 29.45,25.975
  pour cut-out: 25.41,25.975 25.41,24.475 26.91,24.475 26.91,25.975
  pour cut-out: 22.87,25.975 22.87,24.475 24.37,24.475 24.37,25.975
  pour cut-out: 20.33,25.975 20.33,24.475 21.83,24.475 21.83,25.975
  pour cut-out: 17.79,25.975 17.79,24.475 19.29,24.475 19.29,25.975
  pour cut-out: 17.79,25.975 17.79,24.475 19.29,24.475 19.29,25.975
  pour cut-out: 15.25,25.975 15.25,24.475 16.75,24.475 16.75,25.975
  pour cut-out: 12.71,25.975 12.71,24.475 14.21,24.475 14.21,25.975
  pour cut-out: 10.17,25.975 10.17,24.475 11.67,24.475 11.67,25.975
  pour cut-out: 7.63,25.975 7.63,24.475 9.13,24.475 9.13,25.975
  pour cut-out: 7.63,28.515 7.63,27.015 9.13,27.015 9.13,28.515
  pour cut-out: 10.17,28.515 10.17,27.015 11.67,27.015 11.67,28.515
  pour cut-out: 12.71,28.515 12.71,27.015 14.21,27.015 14.21,28.515
  pour cut-out: 15.25,28.515 15.25,27.015 16.75,27.015 16.75,28.515
  pour cut-out: 17.79,28.515 17.79,27.015 19.29,27.015 19.29,28.515
  pour cut-out: 20.33,28.515 20.33,27.015 21.83,27.015 21.83,28.515
  pour cut-out: 22.87,28.515 22.87,27.015 24.37,27.015 24.37,28.515
  pour cut-out: 25.41,28.515 25.41,27.015 26.91,27.015 26.91,28.515
  pour cut-out: 27.95,28.515 27.95,27.015 29.45,27.015 29.45,28.515
  pour cut-out: 30.49,28.515 30.49,27.015 31.99,27.015 31.99,28.515
  pour cut-out: 33.03,28.515 33.03,27.015 34.53,27.015 34.53,28.515
  pour cut-out: 35.57,28.515 35.57,27.015 37.07,27.015 37.07,28.515
  pour cut-out: 38.11,28.515 38.11,27.015 39.61,27.015 39.61,28.515
  pour cut-out: 40.65,28.515 40.65,27.015 42.15,27.015 42.15,28.515
  pour cut-out: 43.19,28.515 43.19,27.015 44.69,27.015 44.69,28.515
  pour cut-out: 45.73,28.515 45.73,27.015 47.23,27.015 47.23,28.515
  pour cut-out: 48.27,28.515 48.27,27.015 49.77,27.015 49.77,28.515
  pour cut-out: 50.81,28.515 50.81,27.015 52.31,27.015 52.31,28.515
  pour cut-out: 53.35,28.515 53.35,27.015 54.85,27.015 54.85,28.515
  pour cut-out: 55.89,28.515 55.89,27.015 57.39,27.015 57.39,28.515
  pour cut-out: 55.89,25.975 55.89,24.475 57.39,24.475 57.39,25.975
  pour cut-out: 53.35,25.975 53.35,24.475 54.85,24.475 54.85,25.975
  pour cut-out: 54.09,27.77 54.09,25.23 56.63,25.23 56.63,27.77
  pour cut-out: 8.37,27.77 8.37,25.23 10.91,25.23 10.91,27.77
  pour cut-out: 63.25,8.877 63.25,8.377 64.6,8.377 64.6,8.877
  text ".Plot_File_Name" at 4.9,31.75 h1
Bottom:
  pour cut-out: 8.37,27.77 8.37,25.23 10.91,25.23 10.91,27.77
  pour cut-out: 54.09,27.77 54.09,25.23 56.63,25.23 56.63,27.77
  pour cut-out: 53.35,25.975 53.35,24.475 54.85,24.475 54.85,25.975
  pour cut-out: 55.89,25.975 55.89,24.475 57.39,24.475 57.39,25.975
  pour cut-out: 55.89,28.515 55.89,27.015 57.39,27.015 57.39,28.515
  pour cut-out: 53.35,28.515 53.35,27.015 54.85,27.015 54.85,28.515
  pour cut-out: 50.81,28.515 50.81,27.015 52.31,27.015 52.31,28.515
  pour cut-out: 48.27,28.515 48.27,27.015 49.77,27.015 49.77,28.515
  pour cut-out: 45.73,28.515 45.73,27.015 47.23,27.015 47.23,28.515
  pour cut-out: 43.19,28.515 43.19,27.015 44.69,27.015 44.69,28.515
  pour cut-out: 40.65,28.515 40.65,27.015 42.15,27.015 42.15,28.515
  pour cut-out: 38.11,28.515 38.11,27.015 39.61,27.015 39.61,28.515
  pour cut-out: 35.57,28.515 35.57,27.015 37.07,27.015 37.07,28.515
  pour cut-out: 33.03,28.515 33.03,27.015 34.53,27.015 34.53,28.515
  pour cut-out: 30.49,28.515 30.49,27.015 31.99,27.015 31.99,28.515
  pour cut-out: 27.95,28.515 27.95,27.015 29.45,27.015 29.45,28.515
  pour cut-out: 25.41,28.515 25.41,27.015 26.91,27.015 26.91,28.515
  pour cut-out: 22.87,28.515 22.87,27.015 24.37,27.015 24.37,28.515
  pour cut-out: 20.33,28.515 20.33,27.015 21.83,27.015 21.83,28.515
  pour cut-out: 17.79,28.515 17.79,27.015 19.29,27.015 19.29,28.515
  pour cut-out: 15.25,28.515 15.25,27.015 16.75,27.015 16.75,28.515
  pour cut-out: 12.71,28.515 12.71,27.015 14.21,27.015 14.21,28.515
  pour cut-out: 10.17,28.515 10.17,27.015 11.67,27.015 11.67,28.515
  pour cut-out: 7.63,28.515 7.63,27.015 9.13,27.015 9.13,28.515
  pour cut-out: 7.63,25.975 7.63,24.475 9.13,24.475 9.13,25.975
  pour cut-out: 10.17,25.975 10.17,24.475 11.67,24.475 11.67,25.975
  pour cut-out: 12.71,25.975 12.71,24.475 14.21,24.475 14.21,25.975
  pour cut-out: 15.25,25.975 15.25,24.475 16.75,24.475 16.75,25.975
  pour cut-out: 17.79,25.975 17.79,24.475 19.29,24.475 19.29,25.975
  pour cut-out: 17.79,25.975 17.79,24.475 19.29,24.475 19.29,25.975
  pour cut-out: 20.33,25.975 20.33,24.475 21.83,24.475 21.83,25.975
  pour cut-out: 22.87,25.975 22.87,24.475 24.37,24.475 24.37,25.975
  pour cut-out: 25.41,25.975 25.41,24.475 26.91,24.475 26.91,25.975
  pour cut-out: 27.95,25.975 27.95,24.475 29.45,24.475 29.45,25.975
  pour cut-out: 30.49,25.975 30.49,24.475 31.99,24.475 31.99,25.975
  pour cut-out: 33.03,25.975 33.03,24.475 34.53,24.475 34.53,25.975
  pour cut-out: 35.57,25.975 35.57,24.475 37.07,24.475 37.07,25.975
  pour cut-out: 38.11,25.975 38.11,24.475 39.61,24.475 39.61,25.975
  pour cut-out: 40.65,25.975 40.65,24.475 42.15,24.475 42.15,25.975
  pour cut-out: 43.19,25.975 43.19,24.475 44.69,24.475 44.69,25.975
  pour cut-out: 45.73,25.975 45.73,24.475 47.23,24.475 47.23,25.975
  pour cut-out: 48.27,25.975 48.27,24.475 49.77,24.475 49.77,25.975
  pour cut-out: 50.81,25.975 50.81,24.475 52.31,24.475 52.31,25.975
  text ".Plot_File_Name" at 4.9,31.75 h1

## Silkscreen, mask and mechanical layers (free items; w line width, h text height)
Top Overlay:
  text ".Plot_File_Name" at 4.9,31.75 h1
  text "POS    NEG" at 1.5,15.225 h1.5 r270
  text "WP DIS" at 17.25,3.175 h1.25
Bottom Overlay:
  text ".Plot_File_Name" at 4.9,31.75 h1
  text "Walrus RPi0W Dual Band Radio" at 59.1,3.575 h1.5
  text "MDL17-0007" at 59.1,2.5 h1.5
  text "Rev 1 -- September 2017" at 59.1,1.425 h1.5
Top Paste:
  text ".Plot_File_Name" at 4.9,31.75 h1
Top Solder:
  text ".Plot_File_Name" at 4.9,31.75 h1
Bottom Solder:
  text ".Plot_File_Name" at 4.9,31.75 h1
PCB Outline:
  the board outline again, w0.01
  text ".Plot_File_Name" at 4.9,31.75 h1
  text "See PDF panel drawing included" at 3.25,19.025 h2
  text "in CAM package for 5-up layout" at 3.65,15.45 h2
Fabrication Notes:
  lines w0.1: 0,3 ccw(c3,3) 3,0 21.5,0 21.5,4.412 cw(c23.088,4.412) 23.088,6 36.912,6 cw(c36.912,4.412) 38.5,4.412 38.5,0 62,0 ; 0,3 0,3 ; 0,3 0,27.325 ; 0,27.325 cw(c3,27.325) 3,30.325 ; 0,27.325 0,27.325 ; 3,30.325 3,30.325 ; 3,30.325 62,30.325 ; 62,0 ccw(c62,3) 65,3 ; 62,0 62,0 ; 62,30.325 cw(c62,27.325) 65,27.325 ; 62,30.325 62,30.325 ; 65,3 65,27.325 ; 65,3 65,3 ; 65,27.325 65,27.325
Top Locator:
  lines w0.01: 6.9,23.7 6.9,29.3 58.1,29.3 58.1,23.7 6.9,23.7

## Text inside footprints (layer, text, board x,y; h text height)
D1: Top Assembly "K" at 15.375,10.65 h0.75
D2: Top Assembly "K" at 16.775,11.125 h0.75 r90
D3: Top Assembly "K" at 15.75,19.25 h0.75 r90
D4: Top Assembly "K" at 10.3,17.105 h0.75
D5: Top Assembly "K" at 12.95,18.525 h0.75
D6: Top Assembly "K" at 64.35,21.275 h0.75 r90
D8: Top Assembly "K" at 63.35,9.375 h0.75 r90
D9: Top Assembly "K" at 64.3,24.1 h0.75 r90
D11: Top Assembly "K" at 50.625,22.6 h0.75